# EAGLE board EncoderBoard (EAGLE 5.00)
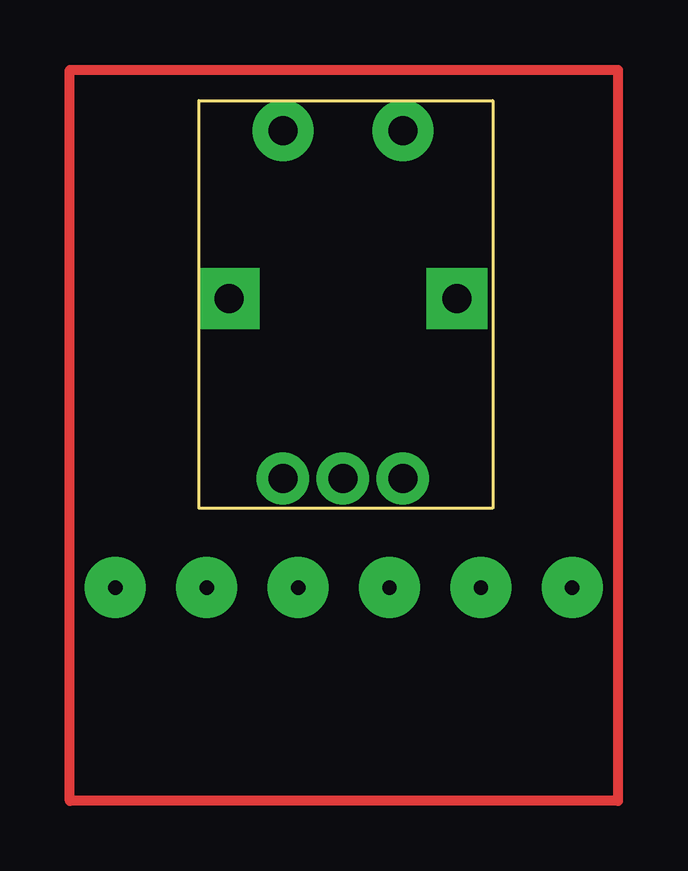
[diagram p0: board, top side]
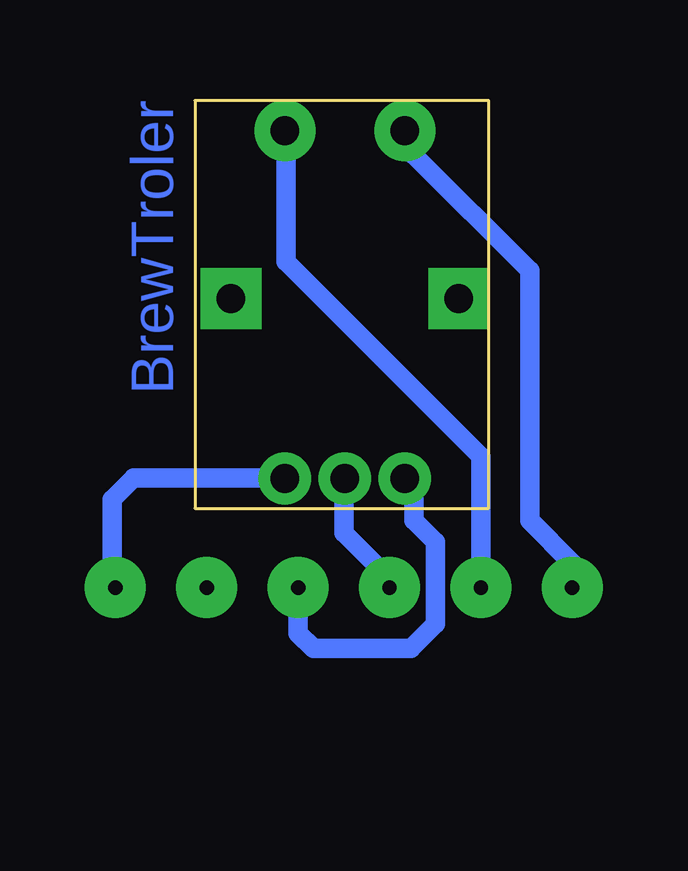
[diagram p1: board, bottom side, seen from below]

Size 12.25 x 17 mm. Coordinates in mm from the lower left corner, seen from the top.
Copper layers (1*16): Top 0.035mm / dielectric 1.5mm / Bottom 0.035mm
Design rules "default": minimum track width 10mil, minimum drill 24mil, track to track 8mil, track to pad 8mil, pad to pad 8mil, via to via 8mil, smd to smd 8mil, copper to edge 40mil, drill to drill 8mil, minimum pad ring 10mil, minimum via ring 8mil, stop-mask expansion 4mil, vias tented up to drill 0mil, thermal gap 10mil

## Footprints (pad centres in the part's own frame; a part is rotated, then mirrored left to right if it is on the bottom)
CUIENCODER = drill 1.2 pad 2.184 round: P$1 0,-14.5; P$4 2.5,-14.5; P$5 5,-14.5 | drill 1.2 pad 2.54 round: P$2 0,0; P$3 5,0 | drill 1.2 pad 2.54 square: P$6 7.25,-7; P$7 -2.25,-7

## Placement (x,y rotation side)
E$1  [CUIENCODER]  3.5,15.75 0 top

## Library data of the parts
E$1 = Personal

## Tracks (layer width: path | path; a pad name or v marks a point on that pad's centre or on a via)
S$1  (via drill 0.6 pad 2.54)
  other vias: -3.49,-3.3
S$2  (via drill 0.6 pad 2.54)
  other vias: 0.33,-3.3
S$3  (via drill 0.6 pad 2.54)
  other vias: 4.13,-3.3
S$4  (via drill 0.6 pad 2.54)
  other vias: 7.95,-3.3
S$5  (via drill 0.6 pad 2.54)
  other vias: 11.75,-3.3
S$6  (via drill 0.6 pad 2.54)
  other vias: 15.57,-3.3
S$7
  Bottom 0.813: 15.69,-2.54 15.69,0.38 14.8,1.27 9.34,1.27
S$8
  Bottom 0.813: 6.04,0.38 6.04,-1.01 4.52,-2.54
S$9
  Bottom 0.813: 3.12,0.38 3.12,-0.51 2.23,-1.4 2.23,-4.82 3.25,-5.84 7.31,-5.84 7.95,-5.21 7.95,-4.06
S$10
  Bottom 0.813: 0.33,-2.41 0.33,2.16 8.45,10.29 8.45,14.73
S$11
  Bottom 0.813: -3.49,-2.28 -1.71,-0.51 -1.71,9.91 3.12,14.73
S$12
  Top 0.406: -5.39,-12.19 -5.39,18.29 17.47,18.29 17.47,-12.19 -5.39,-12.19

## Text on the board
Bottom: BrewTroler